# EAGLE board v1 (EAGLE 9.0.0)
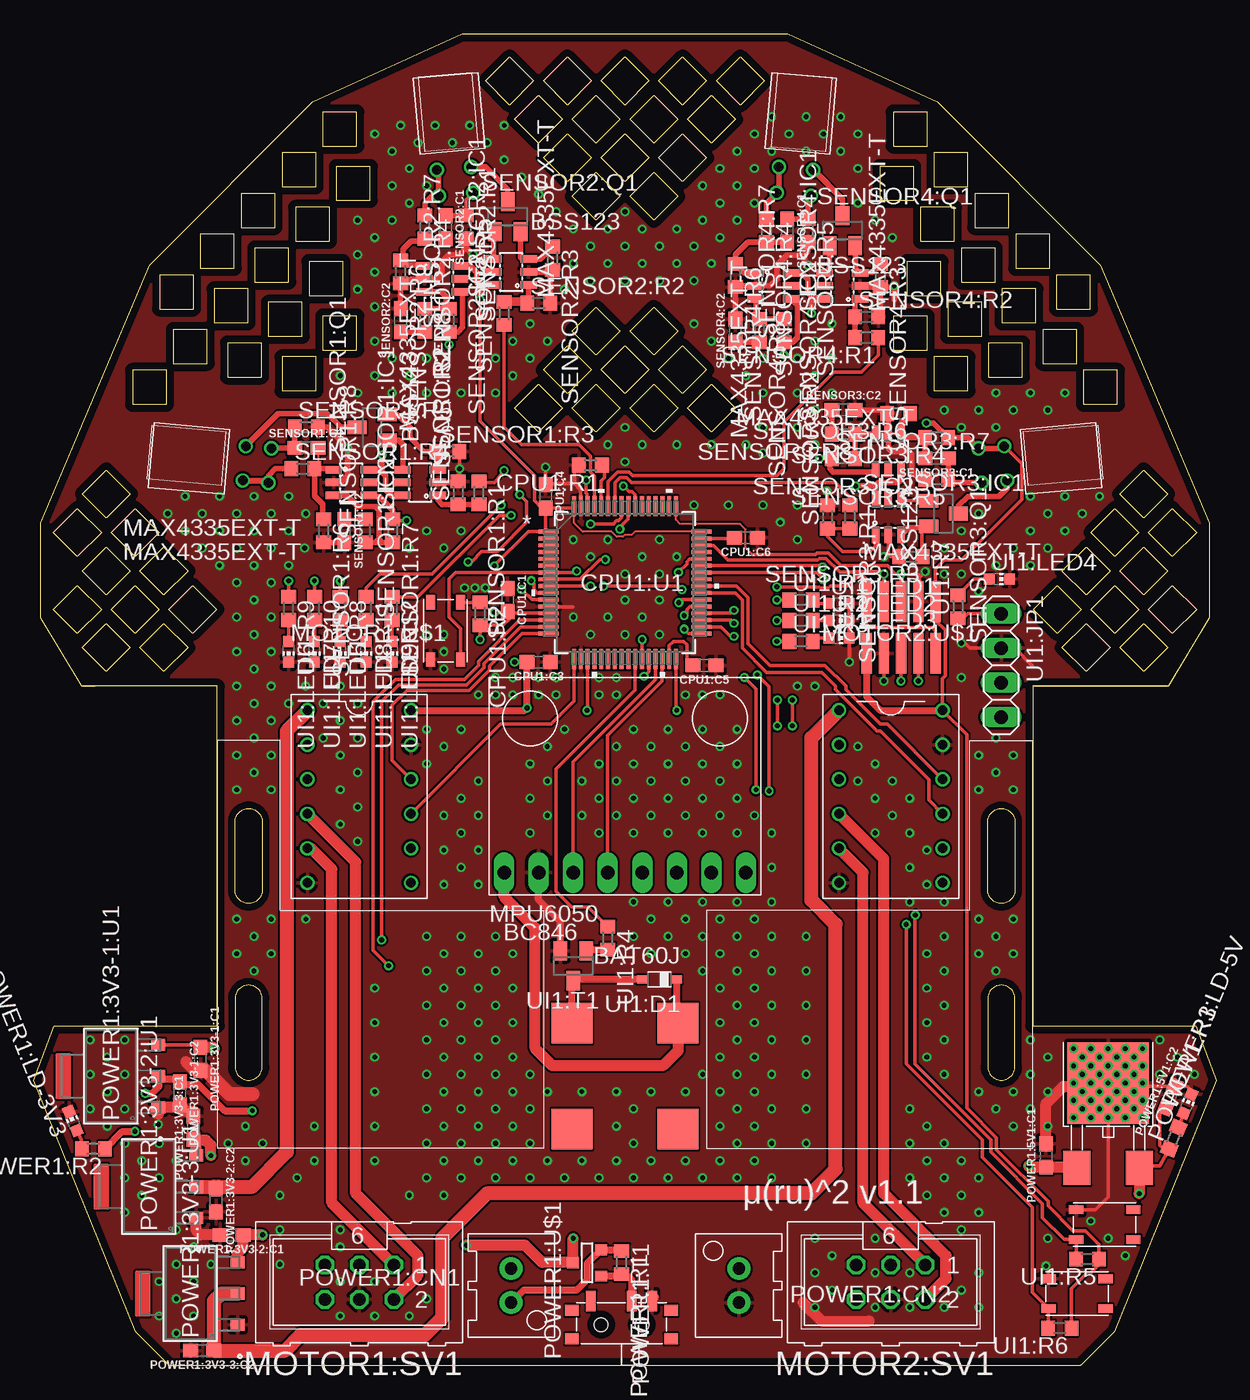
[diagram p0: board, top side]
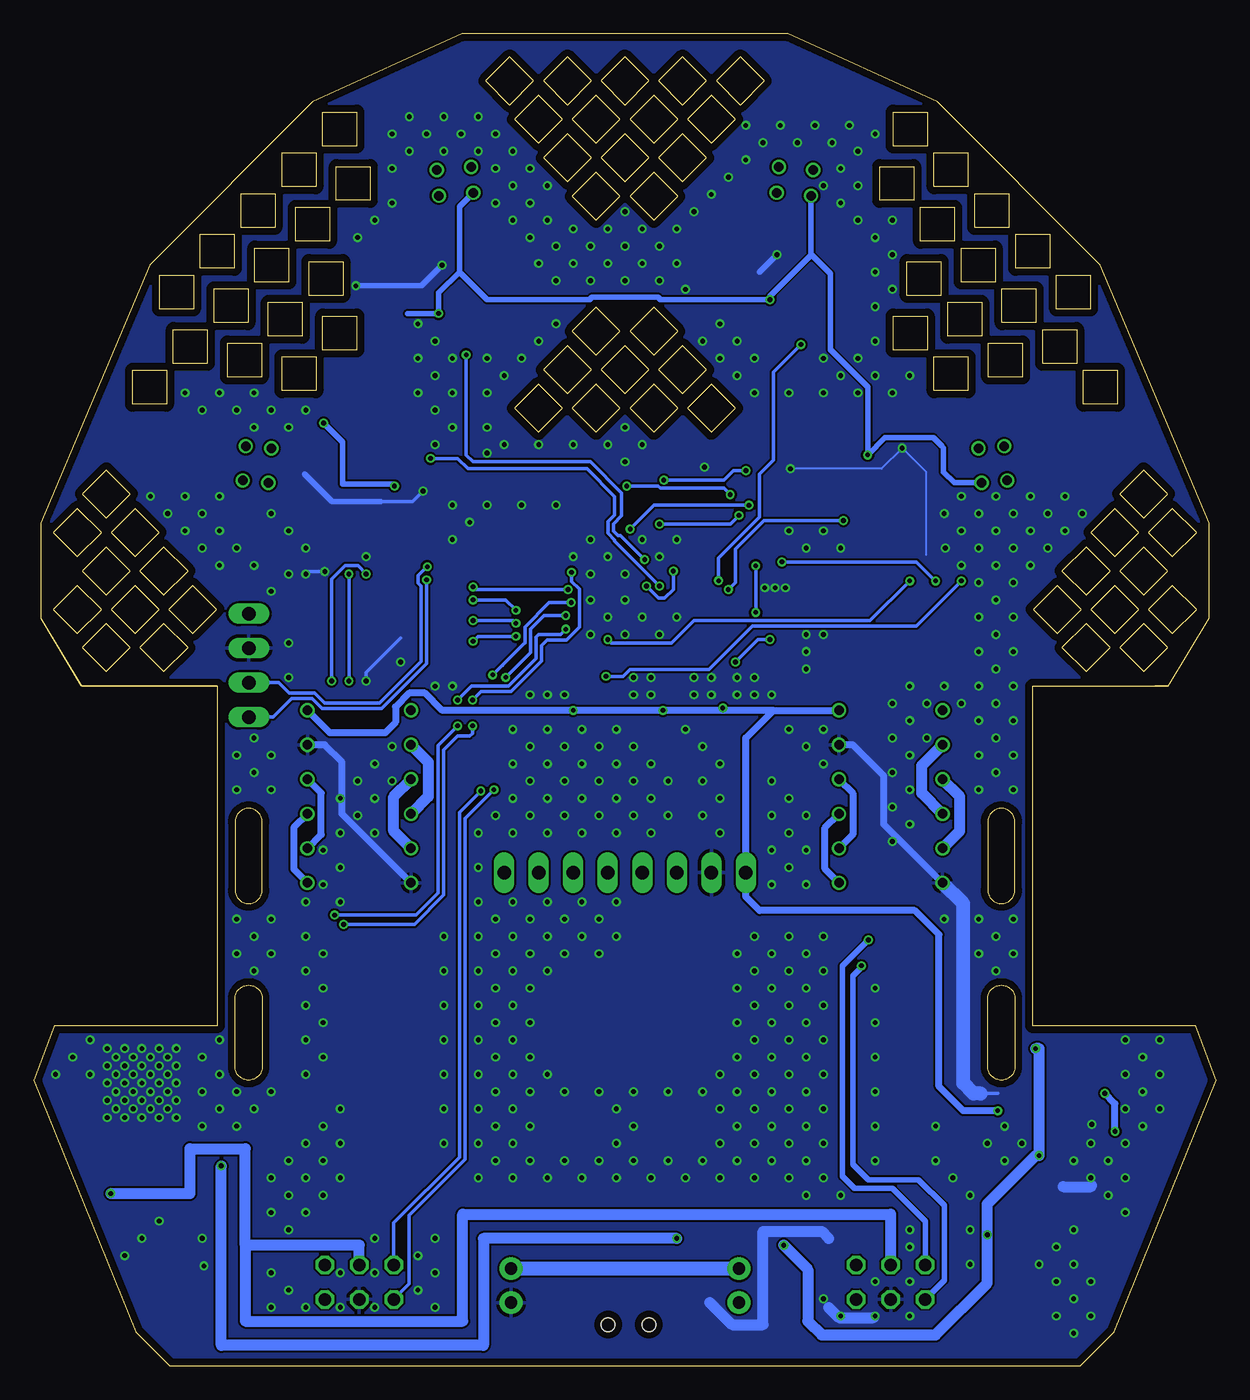
[diagram p1: board, bottom side, seen from below]

Size 87 x 98 mm. Coordinates in mm from the lower left corner, seen from the top.
Outline: 347 segments
Copper layers (1*16): Top 0.035mm / dielectric 1.6mm / Bottom 0.035mm
Design rules "Elecrow_2-layer_PCB_eagle_rule": minimum track width 6mil, minimum drill 12mil, track to track 6mil, track to pad 8mil, pad to pad 12mil, via to via 12mil, smd to smd 0mil, copper to edge 20mil, drill to drill 10mil, minimum pad ring 6mil, minimum via ring 6mil, stop-mask expansion 0mil, vias tented up to drill 100mil, thermal gap 10mil

## Footprints (pad centres in the part's own frame; a part is rotated, then mirrored left to right if it is on the bottom)
0603 = smd 1.1 x 1: 1 -0.85,0; 2 0.85,0
R0603 = smd 1 x 1.1: 1 -0.85,0; 2 0.85,0
LQFP-64 = smd 1.473 x 0.279: 1 -5.626,3.75; 2 -5.626,3.25; 3 -5.626,2.75; 4 -5.626,2.25; 5 -5.626,1.75; 6 -5.626,1.25; 7 -5.626,0.75; 8 -5.626,0.25; 9 -5.626,-0.25; 10 -5.626,-0.75; 11 -5.626,-1.25; 12 -5.626,-1.75; 13 -5.626,-2.25; 14 -5.626,-2.75; 15 -5.626,-3.25; 16 -5.626,-3.75; 33 5.626,-3.75; 34 5.626,-3.25; 35 5.626,-2.75; 36 5.626,-2.25; 37 5.626,-1.75; 38 5.626,-1.25; 39 5.626,-0.75; 40 5.626,-0.25; 41 5.626,0.25; 42 5.626,0.75; 43 5.626,1.25; 44 5.626,1.75; 45 5.626,2.25; 46 5.626,2.75; 47 5.626,3.25; 48 5.626,3.75 | smd 0.279 x 1.473: 17 -3.75,-5.626; 18 -3.25,-5.626; 19 -2.75,-5.626; 20 -2.25,-5.626; 21 -1.75,-5.626; 22 -1.25,-5.626; 23 -0.75,-5.626; 24 -0.25,-5.626; 25 0.25,-5.626; 26 0.75,-5.626; 27 1.25,-5.626; 28 1.75,-5.626; 29 2.25,-5.626; 30 2.75,-5.626; 31 3.25,-5.626; 32 3.75,-5.626; 49 3.75,5.626; 50 3.25,5.626; 51 2.75,5.626; 52 2.25,5.626; 53 1.75,5.626; 54 1.25,5.626; 55 0.75,5.626; 56 0.25,5.626; 57 -0.25,5.626; 58 -0.75,5.626; 59 -1.25,5.626; 60 -1.75,5.626; 61 -2.25,5.626; 62 -2.75,5.626; 63 -3.25,5.626; 64 -3.75,5.626
SKRPACE010 = smd 1.05 x 0.65: 1 -2.1,1.1; 2 2.1,1.1; 3 -2.1,-1.1; 4 2.1,-1.1
PINHEAD = smd 0.76 x 3: 1 -2.54,-1.905; 2 -1.27,-1.905; 3 0,-1.905; 4 1.27,-1.905; 5 2.54,-1.905; 6 2.54,1.905; 7 1.27,1.905; 8 0,1.905; 9 -1.27,1.905; 10 -2.54,1.905
BOARD = drill 1 long: AD0 6.35,-6.35; GND -6.35,-6.35; INT 8.89,-6.35; SCL -3.81,-6.35; SDA -1.27,-6.35; VCC -8.89,-6.35; XCL 1.27,-6.35; XDA 3.81,-6.35
ML6 = drill 0.914 octagon: 1 -2.54,-1.27; 2 -2.54,1.27; 3 0,-1.27; 4 0,1.27; 5 2.54,-1.27; 6 2.54,1.27
DIP_12 = drill 0.7: 1 -6.35,-3.81; 2 -3.81,-3.81; 3 -1.27,-3.81; 4 1.27,-3.81; 5 3.81,-3.81; 6 6.35,-3.81; 7 6.35,3.81; 8 3.81,3.81; 9 1.27,3.81; 10 -1.27,3.81; 11 -3.81,3.81; 12 -6.35,3.81
SOT-223_ST = smd 0.889 x 1.016: 1 -2.299,-3.493; 2 0,-3.493; 3 2.299,-3.493
TO-252-3 = smd 2 x 2.5: 1 -2.3,-6.25; 3 2.3,-6.25 | smd 6 x 6: 2 0,0
B02B-XASK-N = drill 0.9 pad 1.676: P$1 0,1.25; P$2 0,-1.25
CHIP-LED0603 = smd 0.8 x 0.8: A 0,-0.75; C 0,0.75
SOT-23 = smd 0.787 x 0.889: 1 0.025,-1.016; 2 -0.94,1.016; 3 0.991,1.016
SSW1P2T = smd 0.7 x 1.5: A -2.25,1.75; B 0.75,1.75; C 2.25,1.75 | smd 1 x 0.8: G@1 -3.65,1.05; G@2 -3.65,-1.05; G@3 3.65,1.05; G@4 3.65,-1.05 | hole 1: -1.5,0; 1.5,0
SOT23-6L = smd 0.55 x 1.2: 1 -0.95,-1.3; 2 0,-1.3; 3 0.95,-1.3; 4 0.95,1.3; 5 0,1.3; 6 -0.95,1.3
SOT23 = smd 1 x 1.4: 1 -0.95,-1.1; 2 0.95,-1.1; 3 0,1.1
LBR-127HLD = drill 0.7: P$1 -1.27,-1.27; P$2 1.27,-1.27; P$3 -1.27,-3.175; P$4 1.27,-3.175
SOD323_ST = smd 0.8 x 0.6: A 1.25,0; C -1.25,0
1X04 = drill 1.016 long: 1 -3.81,0; 2 -1.27,0; 3 1.27,0; 4 3.81,0
UGCT7525AN4 = smd 3 x 3: + -3.9,3.9; - -3.9,-3.9; NC@1 3.9,3.9; NC@2 3.9,-3.9

## Placement (x,y rotation side)
CPU1:C1  0.1uF  [0603]  34.86,56.35 270 top
CPU1:C3  0.1uF  [0603]  37.15,51.78 180 top
CPU1:C4  0.1uF  [0603]  37.66,63.97 270 top
CPU1:C5  0.1uF  [0603]  49.34,51.52 180 top
CPU1:C6  0.1uF  [0603]  52.39,60.92 180 top
CPU1:R1  10k  [R0603]  40.96,66.26 180 top
CPU1:R2  [R0603]  32.83,55.33 270 top
CPU1:U1  STM32F405RGT6  [LQFP-64]  43.5,57.62 0 top
CPU1:U$1  SKRPACE010  [SKRPACE010]  30.29,54.06 270 top
CPU1:U$2  PINHEAD_10_127  [PINHEAD]  63.82,54.32 180 top
GYRO1:U$1  MPU-6050-BOARD  [BOARD]  43.5,42.63 0 top
MOTOR1:SV1  [ML6]  23.94,6.14 180 top
MOTOR1:U$1  AE-DRV8835  [DIP_12]  23.94,41.87 270 top
MOTOR2:SV1  [ML6]  63.06,6.14 180 top
MOTOR2:U$1  AE-DRV8835  [DIP_12]  63.06,41.87 270 top
POWER1:3V3-1:C1  10nF  [0603]  12.26,22.57 270 top
POWER1:3V3-1:C2  10nF  [0603]  10.73,20.03 270 top
POWER1:3V3-1:U1  AZ1086H-3.3  [SOT-223_ST]  5.65,21.3 90 top
POWER1:3V3-2:C1  10nF  [0603]  14.54,9.61 180 top
POWER1:3V3-2:C2  10nF  [0603]  13.4,12.15 270 top
POWER1:3V3-2:U1  AZ1086H-3.3  [SOT-223_ST]  8.45,13.17 90 top
POWER1:3V3-3:C1  10nF  [0603]  11.75,17.49 90 top
POWER1:3V3-3:C2  10nF  [0603]  12.39,1.1 180 top
POWER1:3V3-3:U1  AZ1086H-3.3  [SOT-223_ST]  11.5,5.3 90 top
POWER1:5V1:C1  10nF  [0603]  74.49,15.46 90 top
POWER1:5V1:C2  10nF  [0603]  83.63,19.77 67.4 top
POWER1:5V1:U$1  NJM7805  [TO-252-3]  79.06,20.79 0 top
POWER1:CN1  2PIN-TOP  [B02B-XASK-N]  35.12,5.88 180 top
POWER1:CN2  2PIN-TOP  [B02B-XASK-N]  51.88,5.88 0 top
POWER1:LD-3V3  [CHIP-LED0603]  2.86,18 22.1 top
POWER1:LD-5V  [CHIP-LED0603]  84.9,19.27 337.4 top
POWER1:R1  [R0603]  43.25,7.58 270 top
POWER1:R2  [R0603]  4.38,15.96 180 top
POWER1:R3  [R0603]  83.89,16.73 67.4 top
POWER1:T1  [SOT-23]  40.71,7.58 270 top
POWER1:U$1  SSW1P2T  [SSW1P2T]  43.25,3.01 0 top
SENSOR1:C1  0.1uF  [0603]  20.05,67.53 0 top
SENSOR1:C2  0.1uF  [0603]  22.85,61.43 270 top
SENSOR1:IC1  MAX4335EXT-T  [SOT23-6L]  28.43,64.99 90 top
SENSOR1:IC2  MAX4335EXT-T  [SOT23-6L]  23.35,64.99 270 top
SENSOR1:Q1  BSS123  [SOT23]  24.88,69.05 90 top
SENSOR1:R1  [R0603]  32.75,64.22 270 top
SENSOR1:R2  [R0603]  31.23,64.22 90 top
SENSOR1:R3  47  [R0603]  30.47,67.27 0 top
SENSOR1:R4  100k  [R0603]  19.8,66 0 top
SENSOR1:R5  1k  [R0603]  20.05,69.05 0 top
SENSOR1:R6  10k  [R0603]  21.32,61.43 270 top
SENSOR1:R7  100k  [R0603]  26.4,61.43 270 top
SENSOR1:R8  10k  [R0603]  24.37,61.43 90 top
SENSOR1:U$1  [LBR-127HLD]  14.21,66.51 85 top
SENSOR2:C1  0.1uF  [0603]  30.29,83.78 270 top
SENSOR2:C2  0.1uF  [0603]  26.99,76.92 90 top
SENSOR2:IC1  MAX4335EXT-T  [SOT23-6L]  35.12,80.48 90 top
SENSOR2:IC2  MAX4335EXT-T  [SOT23-6L]  30.04,79.97 270 top
SENSOR2:Q1  BSS123  [SOT23]  34.86,84.54 0 top
SENSOR2:R1  [R0603]  34.61,77.43 90 top
SENSOR2:R2  [R0603]  37.15,78.19 0 top
SENSOR2:R3  47  [R0603]  38.17,81.5 270 top
SENSOR2:R4  100k  [R0603]  28.77,83.78 270 top
SENSOR2:R5  1k  [R0603]  31.82,83.78 270 top
SENSOR2:R6  10k  [R0603]  26.99,80.48 270 top
SENSOR2:R7  100k  [R0603]  30.55,76.92 90 top
SENSOR2:R8  10k  [R0603]  28.77,76.92 270 top
SENSOR2:U$1  [LBR-127HLD]  30.8,89.37 5 top
SENSOR3:C1  0.1uF  [0603]  66.44,66.76 180 top
SENSOR3:C2  0.1uF  [0603]  59.58,70.32 0 top
SENSOR3:IC1  MAX4335EXT-T  [SOT23-6L]  62.88,62.45 0 top
SENSOR3:IC2  MAX4335EXT-T  [SOT23-6L]  62.88,67.27 180 top
SENSOR3:Q1  BSS123  [SOT23]  66.95,62.7 270 top
SENSOR3:R1  [R0603]  60.06,62.45 270 top
SENSOR3:R2  [R0603]  58.41,62.45 90 top
SENSOR3:R3  47  [R0603]  64.53,59.52 180 top
SENSOR3:R4  100k  [R0603]  66.44,68.29 180 top
SENSOR3:R5  1k  [R0603]  66.44,65.24 180 top
SENSOR3:R6  10k  [R0603]  63.65,70.07 180 top
SENSOR3:R7  100k  [R0603]  59.58,66.76 0 top
SENSOR3:R8  10k  [R0603]  59.58,68.54 180 top
SENSOR3:U$1  [LBR-127HLD]  72.79,66.51 275 top
SENSOR4:C1  0.1uF  [0603]  55.44,83.53 270 top
SENSOR4:C2  0.1uF  [0603]  51.63,76.16 90 top
SENSOR4:IC1  MAX4335EXT-T  [SOT23-6L]  59.5,79.46 90 top
SENSOR4:IC2  MAX4335EXT-T  [SOT23-6L]  54.42,79.46 270 top
SENSOR4:Q1  BSS123  [SOT23]  59.5,83.53 0 top
SENSOR4:R1  [R0603]  61.28,75.65 180 top
SENSOR4:R2  [R0603]  61.28,77.18 0 top
SENSOR4:R3  47  [R0603]  62.3,80.23 270 top
SENSOR4:R4  100k  [R0603]  53.91,83.53 270 top
SENSOR4:R5  1k  [R0603]  56.96,83.53 270 top
SENSOR4:R6  10k  [R0603]  51.63,80.23 270 top
SENSOR4:R7  100k  [R0603]  55.18,76.16 90 top
SENSOR4:R8  10k  [R0603]  53.41,76.16 270 top
SENSOR4:U$1  [LBR-127HLD]  56.2,89.37 355 top
UI1:D1  BAT60J  [SOD323_ST]  46.04,28.41 180 top
UI1:JP1  [1X04]  71.19,51.52 270 top
UI1:LED1  [CHIP-LED0603]  59.25,56.1 270 top
UI1:LED2  [CHIP-LED0603]  59.25,54.83 270 top
UI1:LED3  [CHIP-LED0603]  59.25,53.56 270 top
UI1:LED4  [CHIP-LED0603]  71.06,57.87 270 top
UI1:LED5  [CHIP-LED0603]  22.55,52.54 180 top
UI1:LED6  [CHIP-LED0603]  18.73,52.54 180 top
UI1:LED7  [CHIP-LED0603]  20.64,52.54 180 top
UI1:LED8  [CHIP-LED0603]  24.45,52.54 180 top
UI1:LED9  [CHIP-LED0603]  26.36,52.54 180 top
UI1:R1  [R0603]  56.45,56.35 0 top
UI1:R2  [R0603]  56.45,54.83 0 top
UI1:R3  [R0603]  56.45,53.3 0 top
UI1:R4  [R0603]  42.23,31.46 270 top
UI1:R5  [R0603]  77.54,7.84 180 top
UI1:R6  [R0603]  75.5,2.76 180 top
UI1:R7  [R0603]  68.01,55.84 90 top
UI1:R8  [R0603]  22.55,55.72 270 top
UI1:R9  [R0603]  18.73,55.72 270 top
UI1:R10  [R0603]  20.64,55.72 270 top
UI1:R11  [R0603]  24.45,55.72 270 top
UI1:R12  [R0603]  26.36,55.72 270 top
UI1:T1  BC846  [SOT23]  39.69,29.43 180 top
UI1:U$1  UGCT725AN4  [UGCT7525AN4]  43.5,21.3 270 top
UI1:U$2  SKRPACE010  [SKRPACE010]  78.81,10.38 180 top
UI1:U$3  SKRPACE010  [SKRPACE010]  76.77,5.3 180 top

## Library data of the parts
CPU1:C1 CPU1:C3-CPU1:C6 SENSOR1:C1 SENSOR1:C2 SENSOR2:C1 SENSOR2:C2 SENSOR3:C1 SENSOR3:C2 SENSOR4:C1 SENSOR4:C2 = SparkFun-Capacitors; PROD_ID: CAP-00810
CPU1:R1 CPU1:R2 POWER1:R2 POWER1:R3 UI1:R1-UI1:R12 = rcl; SPICEPREFIX: R
CPU1:U1 = STM32F405RGT6; MANUFACTURER_PART_NUMBER: STM32F405RGT6; VENDOR: STMicroelectronics
CPU1:U$1 UI1:U$2 UI1:U$3 = SMDtact
CPU1:U$2 UI1:JP1 = pinhead
GYRO1:U$1 = MPU-6050
MOTOR1:SV1 MOTOR2:SV1 = con-ml; OC_FARNELL: unknown; OC_NEWARK: unknown
MOTOR1:U$1 MOTOR2:U$1 = drv8835
POWER1:3V3-1:C1 POWER1:3V3-1:C2 POWER1:3V3-2:C1 POWER1:3V3-2:C2 POWER1:3V3-3:C1 POWER1:3V3-3:C2 POWER1:5V1:C1 POWER1:5V1:C2 = SparkFun-Capacitors; PROD_ID: CAP-00867
POWER1:3V3-1:U1 POWER1:3V3-2:U1 POWER1:3V3-3:U1 = AZ1086H-3.3; MANUFACTURER_PART_NUMBER: LT3092EST#PBF; VENDOR: Linear Technology
POWER1:5V1:U$1 = NJM7805
POWER1:CN1 POWER1:CN2 = XA-connector_Kai
POWER1:LD-3V3 POWER1:LD-5V UI1:LED1-UI1:LED9 = led
POWER1:R1 SENSOR1:R1-SENSOR1:R8 SENSOR2:R1-SENSOR2:R8 SENSOR3:R1-SENSOR3:R8 SENSOR4:R1-SENSOR4:R8 = eagle-ltspice; SPICEMODEL: NONE; SPICEPREFIX: R
POWER1:T1 = zetex; OC_FARNELL: unknown; OC_NEWARK: unknown
POWER1:U$1 = ssw1p2t
SENSOR1:IC1 SENSOR1:IC2 SENSOR2:IC1 SENSOR2:IC2 SENSOR3:IC1 SENSOR3:IC2 SENSOR4:IC1 SENSOR4:IC2 = maxim; OC_FARNELL: unknown; OC_NEWARK: unknown
SENSOR1:Q1 SENSOR2:Q1 SENSOR3:Q1 SENSOR4:Q1 = transistor-small-signal
SENSOR1:U$1 SENSOR2:U$1 SENSOR3:U$1 SENSOR4:U$1 = phoitorteavht
UI1:D1 = diode
UI1:T1 = transistor-neu-to92
UI1:U$1 = UGCT7525AN4

## Nets
3V3: CPU1:C1.2 CPU1:C3.2 CPU1:C4.2 CPU1:R2.2 CPU1:U1.1 CPU1:U1.13 CPU1:U1.19 CPU1:U1.32 CPU1:U1.48 CPU1:U1.64 CPU1:U$2.1 CPU1:U$2.6 GYRO1:U$1.VCC MOTOR1:U$1.12 MOTOR2:U$1.12 POWER1:3V3-1:C2.1 POWER1:3V3-1:U1.2 POWER1:R2.1 SENSOR1:IC1.6 SENSOR1:IC2.6 SENSOR1:R4.1 SENSOR1:U$1.P$1 SENSOR1:U$1.P$3 SENSOR2:IC1.6 SENSOR2:IC2.6 SENSOR2:R4.1 SENSOR2:U$1.P$1 SENSOR2:U$1.P$3 SENSOR3:IC1.6 SENSOR3:IC2.6 SENSOR3:R4.1 SENSOR3:U$1.P$1 SENSOR3:U$1.P$3 SENSOR4:IC1.6 SENSOR4:IC2.6 SENSOR4:R4.1 SENSOR4:U$1.P$1 SENSOR4:U$1.P$3 UI1:D1.C UI1:R5.1 UI1:R6.1 UI1:U$1.+
5V: MOTOR1:SV1.3 MOTOR2:SV1.3 POWER1:5V1:C2.1 POWER1:5V1:U$1.3 POWER1:R3.1
CPU1:N$1: CPU1:R1.1 CPU1:U1.60
CPU1:N$2: CPU1:R2.1 CPU1:U$1.1
CPU1:N$3: CPU1:C5.2 CPU1:U1.31
CPU1:N$4: CPU1:C6.2 CPU1:U1.47
CPU1:NRST: CPU1:U1.7 CPU1:U$1.2 CPU1:U$2.5 CPU1:U$2.10
CPU1:SWCLK: CPU1:U1.49 CPU1:U$2.3 CPU1:U$2.8
CPU1:SWDIO: CPU1:U1.46 CPU1:U$2.4 CPU1:U$2.9
GND: CPU1:C1.1 CPU1:C3.1 CPU1:C4.1 CPU1:C5.1 CPU1:C6.1 CPU1:R1.2 CPU1:U1.12 CPU1:U1.18 CPU1:U1.63 CPU1:U$1.4 CPU1:U$2.2 CPU1:U$2.7 GYRO1:U$1.GND MOTOR1:SV1.4 MOTOR1:U$1.6 MOTOR1:U$1.11 MOTOR2:SV1.4 MOTOR2:U$1.6 MOTOR2:U$1.11 POWER1:3V3-1:C1.2 POWER1:3V3-1:C2.2 POWER1:3V3-1:U1.1 POWER1:3V3-2:C1.2 POWER1:3V3-2:C2.2 POWER1:3V3-2:U1.1 POWER1:3V3-3:C1.2 POWER1:3V3-3:C2.2 POWER1:3V3-3:U1.1 POWER1:5V1:C1.2 POWER1:5V1:C2.2 POWER1:5V1:U$1.2 POWER1:CN2.P$2 POWER1:LD-3V3.C POWER1:LD-5V.C POWER1:U$1.C SENSOR1:C2.2 SENSOR1:IC1.2 SENSOR1:IC2.2 SENSOR1:R2.2 SENSOR1:R3.2 SENSOR1:R5.2 SENSOR1:R6.2 SENSOR2:C2.2 SENSOR2:IC1.2 SENSOR2:IC2.2 SENSOR2:R2.2 SENSOR2:R3.2 SENSOR2:R5.2 SENSOR2:R6.2 SENSOR3:C2.2 SENSOR3:IC1.2 SENSOR3:IC2.2 SENSOR3:R2.2 SENSOR3:R3.2 SENSOR3:R5.2 SENSOR3:R6.2 SENSOR4:C2.2 SENSOR4:IC1.2 SENSOR4:IC2.2 SENSOR4:R2.2 SENSOR4:R3.2 SENSOR4:R5.2 SENSOR4:R6.2 UI1:JP1.2 UI1:LED1.C UI1:LED2.C UI1:LED3.C UI1:LED4.C UI1:LED5.C UI1:LED6.C UI1:LED7.C UI1:LED8.C UI1:LED9.C UI1:T1.2 UI1:U$2.4 UI1:U$3.4
GYRO1:N$8: GYRO1:U$1.XDA
GYRO1:N$9: GYRO1:U$1.XCL
GYRO1:N$10: GYRO1:U$1.AD0
MOTOR1:M+: MOTOR1:SV1.2 MOTOR1:U$1.2 MOTOR1:U$1.4
MOTOR1:M-: MOTOR1:SV1.1 MOTOR1:U$1.3 MOTOR1:U$1.5
MOTOR2:M+: MOTOR2:SV1.2 MOTOR2:U$1.2 MOTOR2:U$1.4
MOTOR2:M-: MOTOR2:SV1.1 MOTOR2:U$1.3 MOTOR2:U$1.5
N$1: CPU1:U1.38 MOTOR2:SV1.5
N$2: CPU1:U1.37 MOTOR2:SV1.6
N$3: CPU1:U1.39 MOTOR2:U$1.7 MOTOR2:U$1.9
N$4: CPU1:U1.15 MOTOR1:SV1.5
N$5: CPU1:U1.40 MOTOR2:U$1.8 MOTOR2:U$1.10
N$6: CPU1:U1.14 MOTOR1:SV1.6
N$7: CPU1:U1.17 MOTOR1:U$1.7 MOTOR1:U$1.9
N$8: CPU1:U1.16 MOTOR1:U$1.8 MOTOR1:U$1.10
N$9: CPU1:U1.36 UI1:R1.1
N$10: CPU1:U1.35 UI1:R2.1
N$11: CPU1:U1.34 UI1:R3.1
N$12: CPU1:U1.26 UI1:R4.1
N$13: CPU1:U1.33 UI1:R5.2 UI1:U$2.2
N$14: CPU1:U1.44 UI1:R6.2 UI1:U$3.2
N$15: CPU1:U1.30 GYRO1:U$1.SDA
N$16: CPU1:U1.29 GYRO1:U$1.SCL
N$17: CPU1:U1.62 SENSOR1:R1.1
N$18: CPU1:U1.61 SENSOR2:R1.1
N$19: CPU1:U1.11 SENSOR1:IC2.4 SENSOR1:R7.1
N$20: CPU1:U1.10 SENSOR2:IC2.4 SENSOR2:R7.1
N$21: CPU1:U1.58 SENSOR3:R1.1
N$22: CPU1:U1.9 SENSOR3:IC2.4 SENSOR3:R7.1
N$23: CPU1:U1.59 SENSOR4:R1.1
N$24: CPU1:U1.8 SENSOR4:IC2.4 SENSOR4:R7.1
N$25: CPU1:U1.42 UI1:JP1.4
N$26: CPU1:U1.43 UI1:JP1.3
N$27: CPU1:U1.27 UI1:R8.1
N$28: CPU1:U1.28 UI1:R9.1
N$29: CPU1:U1.55 UI1:R10.1
N$30: CPU1:U1.56 UI1:R11.1
N$31: CPU1:U1.57 UI1:R12.1
POWER1:BAT: POWER1:CN1.P$1 POWER1:R1.1 POWER1:T1.2
POWER1:N$1: POWER1:R1.2 POWER1:T1.3 POWER1:U$1.B
POWER1:N$2: POWER1:CN1.P$2 POWER1:CN2.P$1
POWER1:N$3: POWER1:LD-3V3.A POWER1:R2.2
POWER1:N$4: POWER1:LD-5V.A POWER1:R3.2
POWER1:VCC: POWER1:3V3-1:C1.1 POWER1:3V3-1:U1.3 POWER1:3V3-2:C1.1 POWER1:3V3-2:U1.3 POWER1:3V3-3:C1.1 POWER1:3V3-3:U1.3 POWER1:5V1:C1.1 POWER1:5V1:U$1.1 POWER1:T1.1
SENSOR1:N$1: SENSOR1:IC1.1 SENSOR1:R1.2 SENSOR1:R2.1
SENSOR1:N$2: SENSOR1:IC1.3 SENSOR1:Q1.2 SENSOR1:R3.1
SENSOR1:N$3: SENSOR1:IC1.4 SENSOR1:Q1.1
SENSOR1:N$4: SENSOR1:C1.2 SENSOR1:IC2.1 SENSOR1:R4.2 SENSOR1:R6.1
SENSOR1:N$5: SENSOR1:Q1.3 SENSOR1:U$1.P$2
SENSOR1:N$7: SENSOR1:IC2.3 SENSOR1:R7.2 SENSOR1:R8.1
SENSOR1:N$8: SENSOR1:C2.1 SENSOR1:R8.2
SENSOR1:N$9: SENSOR1:C1.1 SENSOR1:R5.1 SENSOR1:U$1.P$4
SENSOR2:N$1: SENSOR2:IC1.1 SENSOR2:R1.2 SENSOR2:R2.1
SENSOR2:N$2: SENSOR2:IC1.3 SENSOR2:Q1.2 SENSOR2:R3.1
SENSOR2:N$3: SENSOR2:IC1.4 SENSOR2:Q1.1
SENSOR2:N$4: SENSOR2:C1.2 SENSOR2:IC2.1 SENSOR2:R4.2 SENSOR2:R6.1
SENSOR2:N$5: SENSOR2:Q1.3 SENSOR2:U$1.P$2
SENSOR2:N$7: SENSOR2:IC2.3 SENSOR2:R7.2 SENSOR2:R8.1
SENSOR2:N$8: SENSOR2:C2.1 SENSOR2:R8.2
SENSOR2:N$9: SENSOR2:C1.1 SENSOR2:R5.1 SENSOR2:U$1.P$4
SENSOR3:N$1: SENSOR3:IC1.1 SENSOR3:R1.2 SENSOR3:R2.1
SENSOR3:N$2: SENSOR3:IC1.3 SENSOR3:Q1.2 SENSOR3:R3.1
SENSOR3:N$3: SENSOR3:IC1.4 SENSOR3:Q1.1
SENSOR3:N$4: SENSOR3:C1.2 SENSOR3:IC2.1 SENSOR3:R4.2 SENSOR3:R6.1
SENSOR3:N$5: SENSOR3:Q1.3 SENSOR3:U$1.P$2
SENSOR3:N$7: SENSOR3:IC2.3 SENSOR3:R7.2 SENSOR3:R8.1
SENSOR3:N$8: SENSOR3:C2.1 SENSOR3:R8.2
SENSOR3:N$9: SENSOR3:C1.1 SENSOR3:R5.1 SENSOR3:U$1.P$4
SENSOR4:N$1: SENSOR4:IC1.1 SENSOR4:R1.2 SENSOR4:R2.1
SENSOR4:N$2: SENSOR4:IC1.3 SENSOR4:Q1.2 SENSOR4:R3.1
SENSOR4:N$3: SENSOR4:IC1.4 SENSOR4:Q1.1
SENSOR4:N$4: SENSOR4:C1.2 SENSOR4:IC2.1 SENSOR4:R4.2 SENSOR4:R6.1
SENSOR4:N$5: SENSOR4:Q1.3 SENSOR4:U$1.P$2
SENSOR4:N$7: SENSOR4:IC2.3 SENSOR4:R7.2 SENSOR4:R8.1
SENSOR4:N$8: SENSOR4:C2.1 SENSOR4:R8.2
SENSOR4:N$9: SENSOR4:C1.1 SENSOR4:R5.1 SENSOR4:U$1.P$4
UI1:N$1: UI1:LED1.A UI1:R1.2
UI1:N$2: UI1:LED2.A UI1:R2.2
UI1:N$3: UI1:LED3.A UI1:R3.2
UI1:N$4: UI1:D1.A UI1:T1.3 UI1:U$1.-
UI1:N$5: UI1:R4.2 UI1:T1.1
UI1:N$6: UI1:JP1.1 UI1:R7.1
UI1:N$7: UI1:LED4.A UI1:R7.2
UI1:N$8: UI1:LED5.A UI1:R8.2
UI1:N$9: UI1:LED6.A UI1:R9.2
UI1:N$10: UI1:LED7.A UI1:R10.2
UI1:N$11: UI1:LED8.A UI1:R11.2
UI1:N$12: UI1:LED9.A UI1:R12.2
VCCM1: MOTOR1:U$1.1 POWER1:3V3-2:C2.1 POWER1:3V3-2:U1.2
VCCM2: MOTOR2:U$1.1 POWER1:3V3-3:C2.1 POWER1:3V3-3:U1.2

## Tracks (layer width: path | path; a pad name or v marks a point on that pad's centre or on a via)
3V3  (via drill 0.35)
  Top 0.152: 25.64,65.75 25.51,65.88 25.45,65.94 25.39,65.94 25.64,66.19 v25.64,67.02 | SENSOR1:U$1.P$1 15.53,64.97 SENSOR1:U$1.P$3 17.51,64.97 | CPU1:U1.64 39.75,62.01 40.38,61.37 42.52,61.37 42.89,61 43.35,61 43.48,61.13 43.98,61.13 44.23,61.37 CPU1:U1.48
  Top 0.254: POWER1:3V3-1:U1.2 9.21,21.3 | 10.99,21.3 10.73,21.04 POWER1:3V3-1:C2.1 11.08,20.54 | UI1:R6.1 76.35,5.64 77.54,6.82 77.79,6.82 78.39,7.42 UI1:R5.1 78.39,8.91 77.37,9.93 76.46,9.93 74.64,11.75 74.64,12.07 70.83,15.88 70.83,16.77 68.65,18.95 68.65,46.44 MOTOR2:U$1.12 66.87,50.57 67.07,50.78 67.07,54.12 66.36,54.83 CPU1:U$2.1 66.36,58.64 67,59.27 68.27,59.27 72.71,63.72 72.71,66.37 SENSOR3:U$1.P$1 | CPU1:U1.13 34.99,55.37 | 34.93,55.43 CPU1:C1.2 | CPU1:C4.2 39.62,63.12 CPU1:U1.64 | CPU1:C4.2 37.66,61.59 CPU1:U1.1 36.39,61.37 v33.88,58.86 | 34.99,55.37 34.99,54.96 34.52,54.48 CPU1:R2.2 v32.83,53.43 | CPU1:C3.2 v35.37,51.78 | CPU1:U1.19 40.75,48.27 v40.71,48.22 | CPU1:U1.32 47.25,48.28 v47.31,48.22 | CPU1:C4.2 37.37,63.12 36.83,63.66 36.83,65.51 32.83,69.5 v32.83,78.45 | v33.88,55.43 34.93,55.43 | 34.93,55.43 34.99,55.37
  Top 0.406: SENSOR1:U$1.P$1 17.35,65.13 17.51,64.97 | SENSOR1:U$1.P$3 17.26,65.5 17.77,66 SENSOR1:R4.1 | SENSOR1:IC2.6 25.39,65.94 | 25.51,65.88 25.64,66 v25.64,67.02 | 25.64,65.75 25.89,65.49 25.89,64.48 26.34,64.04 SENSOR1:IC1.6 | SENSOR2:R4.1 28.77,85.56 29.3,86.1 29.78,86.1 | 29.78,86.1 SENSOR2:U$1.P$3 | SENSOR2:U$1.P$1 29.78,87.86 29.78,86.1 | SENSOR2:IC2.6 32.14,80.92 32.58,80.48 32.58,79.72 32.83,79.46 | SENSOR2:IC1.6 33.75,79.46 32.83,79.46 | v32.83,78.45 32.83,79.46 | SENSOR4:R4.1 53.91,85.56 54.66,86.3 SENSOR4:U$1.P$3 54.82,86.48 SENSOR4:U$1.P$1 | SENSOR4:IC2.6 56.52,80.41 56.96,79.97 56.96,78.96 57.4,78.51 57.47,78.51 | SENSOR4:IC1.6 57.47,78.51 | v57.22,77.43 57.22,78.26 57.47,78.51 | SENSOR3:U$1.P$1 71.25,67.5 SENSOR3:U$1.P$3 68.73,68.29 SENSOR3:R4.1 66.21,69.37 v65.68,69.37 | SENSOR3:IC2.6 63.83,65.17 63.63,64.97 62.12,64.97 61.93,64.78 | SENSOR3:IC1.6 61.93,64.78 | v60.47,64.73 60.52,64.78 61.93,64.78
  Top 0.508: UI1:D1.C 47.29,25.31 UI1:U$1.+ | POWER1:R2.1 6.5,17.23 v7.43,17.23 | v8.19,20.03 8.7,20.03 9.21,20.54 9.21,21.04 | 9.21,21.04 9.21,21.3 | 9.21,21.04 10.57,21.04 POWER1:3V3-1:C2.1 10.9,20.71 12.08,20.71 14.04,18.76 v16.07,18.76 | MOTOR1:U$1.12 36.13,48.22 v36.3,48.39 CPU1:C3.2 | CPU1:U$2.6 61.28,49.24 62.3,48.22 MOTOR2:U$1.12
  Top 0.813: UI1:U$1.+ 47.4,23.17 46.29,22.06 38.17,22.06 36.9,23.33 36.9,32.22 34.61,34.51 GYRO1:U$1.VCC
  Bottom 0.152: 20.05,67.53 20.18,67.65
  Bottom 0.254: v35.37,51.78 33.72,53.43 v32.83,53.43 | v33.88,58.86 v33.88,55.43
  Bottom 0.406: SENSOR2:U$1.P$3 29.81,81.72 | 29.81,81.72 32.83,78.7 v32.83,78.45 40.89,78.45 41.07,78.63 45.93,78.63 46.11,78.45 53.66,78.45 55.69,80.48 | SENSOR4:U$1.P$3 55.69,85.28 55.69,80.48 | 55.69,80.48 57.22,78.96 v57.22,77.43 59.5,77.43 | SENSOR1:U$1.P$3 19.27,64.97 20.05,65.75 20.05,67.53 | 20.18,67.65 20.81,68.29 24.37,68.29 v25.64,67.02 25.64,72.02 28.39,74.77 28.39,80.35 29.76,81.72 29.81,81.72 | v65.68,69.37 64.28,67.97 64.28,64.86 60.6,64.86 v60.47,64.73
  Bottom 0.508: v7.43,17.23 7.43,19.27 v8.19,20.03 | v16.07,18.76 18.61,18.76 20.39,20.54 20.39,31.71 22.16,33.49 33.59,33.49 34.61,34.51 GYRO1:U$1.VCC 34.61,46.19 32.58,48.22 | 32.58,48.22 MOTOR1:U$1.12 | 32.58,48.22 v40.71,48.22 v47.31,48.22 56.96,48.22 58.23,49.49 59.38,49.49 60.39,48.48 60.39,47.33 61.15,46.57 65.22,46.57 MOTOR2:U$1.12
5V  (via drill 0.35)
  Top 0.254: 81.35,14.55 POWER1:5V1:U$1.3 81.51,14.69 82.87,14.69 POWER1:R3.1 83.15,15.94 82.87,16.22 82.87,18.55 POWER1:5V1:C2.1
  Top 0.813: POWER1:5V1:U$1.3 81.36,12.68 v81.35,12.66
  Bottom 0.813: v81.35,12.66 75.5,12.66 75.5,15.96 71.44,15.96 71.44,8.85 | MOTOR2:SV1.3 63.06,8.85 71.44,8.85 | MOTOR1:SV1.3 23.94,11.14 55.44,11.14 55.44,3.26 71.44,3.26 71.44,8.85
CPU1:N$1
  Top 0.254: CPU1:U1.60 41.72,63.27 41.72,65.09 41.98,65.34 41.98,66.09 CPU1:R1.1
CPU1:N$2
  Top 0.254: CPU1:U$1.1 32.81,56.16 CPU1:R2.1
CPU1:N$3
  Top 0.254: CPU1:U1.31 46.75,53 47.06,53.3 47.82,53.3 48.07,53.05 48.07,51.94 CPU1:C5.2
CPU1:N$4
  Top 0.254: CPU1:U1.47 51.49,60.87 CPU1:C6.2
CPU1:NRST  (via drill 0.35)
  Top 0.203: 57.6,57.31 57.8,57.31 57.86,57.25 58.49,57.25 58.61,57.37
  Top 0.254: CPU1:U$1.2 31.39,54.23 30.55,55.08 30.55,57.87 31.04,58.37 CPU1:U1.7 39.84,58.37 v39.94,58.48 | CPU1:U$2.10 66.36,54.06 66.11,54.32 61.53,54.32 61.28,54.57 CPU1:U$2.5 | CPU1:U$2.5 61.28,56.35 | v54.68,57.31 57.6,57.31 | CPU1:U$2.5 61.28,57.87 61.11,58.04 60.55,58.04 59.88,57.37 58.61,57.37 | v41.92,57.37 47.44,57.37 v47.69,57.11
  Bottom 0.254: v39.94,58.48 39.94,57.11 40.58,56.48 41.03,56.48 v41.92,57.37 | v47.69,57.11 54.48,57.11 v54.68,57.31
CPU1:SWCLK  (via drill 0.35)
  Top 0.152: 52.9,59.68 52.37,60.21 52.37,61.54 51.97,61.94 47.56,61.94 47.25,62.25 CPU1:U1.49
  Top 0.254: CPU1:U$2.8 v63.82,50.38 | CPU1:U$2.3 v63.82,58.26 63.41,58.26 62.8,58.86 59.41,58.86 58.47,59.8 57.63,59.8 57.51,59.68 52.9,59.68
  Bottom 0.254: v63.82,50.38 v63.82,58.26
CPU1:SWDIO  (via drill 0.35)
  Top 0.254: CPU1:U$2.9 v65.09,50.38 | CPU1:U$2.4 v62.55,58.26 62.36,58.45 60.39,58.45 60.32,58.38 59.31,58.38 58.3,59.39 57.8,59.39 57.68,59.28 51.06,59.28 50,60.34 49.16,60.34 CPU1:U1.46
  Bottom 0.254: v65.09,50.38 65.09,57.87 64.1,58.86 63.16,58.86 v62.55,58.26
GND  (via drill 0.35)
  Top 0.152: SENSOR1:R2.2 31.14,64.99 30.97,64.99
  Top 0.254: 11.82,18.69 POWER1:3V3-3:C1.2 | 73.47,51.52 73.48,51.54 73.46,51.54 72.2,52.79 UI1:JP1.2 68.9,52.79 68.01,53.68 | POWER1:LD-5V.C 85.19,20.25 84.88,20.56 POWER1:5V1:C2.2 79.29,20.56 POWER1:5V1:U$1.2 | UI1:U$2.4 78.13,11.48 79.06,12.41 79.06,20.28 78.81,20.54 | UI1:U$3.4 74.67,7.14 v74.49,7.33 | 37.74,64.9 CPU1:C4.1 v37.66,66.13 | 37.74,64.9 37.82,64.99 | 40.22,63.28 CPU1:U1.63 40.25,64.02 40.24,64.03 40.24,64.44 39.77,64.9 | UI1:LED1.C UI1:LED2.C UI1:LED3.C 60.01,53.54 v60.01,51.78 | MOTOR2:SV1.4 63.02,4.83 | SENSOR1:R3.2 v31.32,66 31.32,65.16 SENSOR1:R2.2 | 39.77,64.9 37.74,64.9 | 39.77,64.9 39.77,65.92 CPU1:R1.2 | CPU1:U$2.7 v62.55,50.38 | CPU1:U1.12 37.9,55.84 39.69,55.84 | SENSOR3:R2.2 58.41,64.3 v58.36,64.35 | CPU1:U$2.2 65.09,57.94 v65.6,58.44 | SENSOR3:R3.2 63.06,59.52 62.88,59.7 SENSOR3:IC1.2
  Top 0.406: SENSOR1:IC2.2 22.59,64.99 23.1,65.49 v23.1,67.53 21.58,69.05 SENSOR1:R5.2 | SENSOR1:IC1.2 30.97,64.99 | SENSOR1:C2.2 SENSOR1:R6.2 | 31.82,82.26 31.31,81.75 30.55,81.75 30.04,81.24 30.04,80.23 29.78,79.97 SENSOR2:IC2.2 27.75,79.97 27.41,79.63 SENSOR2:R6.2 SENSOR2:C2.2 | 31.82,82.26 SENSOR2:R5.2 | SENSOR2:R3.2 38,80.48 37.91,80.48 | SENSOR2:IC1.2 37.91,80.48 | SENSOR2:R2.2 38,80.39 37.91,80.48 | v32.32,81.75 31.82,82.26 | SENSOR4:C2.2 SENSOR4:R6.2 51.72,79.46 SENSOR4:IC2.2 54.17,79.46 54.68,79.97 54.68,80.99 55.41,81.72 56.48,81.72 56.71,81.5 | SENSOR4:R5.2 56.96,82 56.71,81.75 56.71,81.5 | SENSOR4:IC1.2 60.89,79.38 SENSOR4:R3.2 | SENSOR4:R2.2 62.3,77.27 SENSOR4:R3.2 | SENSOR4:R3.2 63.22,79.38 v63.31,79.46 63.31,78.45 | v56.96,80.99 56.71,81.24 56.71,81.5 | SENSOR3:C2.2 62.54,70.32 | 62.88,69.81 SENSOR3:IC2.2 62.88,67.53 63.14,67.27 64.41,67.27 64.63,67.05 64.63,65.78 64.92,65.49 65.34,65.49 SENSOR3:R5.2 | 62.88,69.81 62.88,69.98 SENSOR3:R6.2 | CPU1:U$2.2 65.09,58.13 | 62.76,69.94 62.88,69.81
  Top 0.508: POWER1:U$1.C 45.78,5.04 | UI1:T1.2 38.74,32.66 37.15,34.25 GYRO1:U$1.GND
  Top 0.813: POWER1:3V3-2:C1.2 12.26,9.61 11.94,9.93 POWER1:3V3-2:U1.1 | 56.61,4.63 57.98,3.26 61.45,3.26 | POWER1:3V3-1:U1.1 10.55,19 POWER1:3V3-1:C2.2 11.22,18.69 11.82,18.69 | 8.9,18.75 9.15,18.5 | POWER1:3V3-1:C1.2 11.81,21.72 11.17,22.35 | POWER1:5V1:C1.2 74.49,19.27 75.76,20.54 78.81,20.54 79.27,20.54 79.29,20.56
  Top 1.016: POWER1:3V3-1:C1.2 12.64,21.72 14.38,19.98 16.07,19.98
  Bottom 0.152: v31.32,66 24.62,66 v23.1,67.53 21.32,65.75 21.32,59.65
  Bottom 0.254: v62.55,50.38 62.55,51.02 UI1:LED3.C | v37.66,66.13 37.78,66.13 | 16.07,20.03 17.34,20.03 | v58.36,64.35 59.12,63.59 61.49,63.59 | v65.6,58.44 66.81,58.44 v67,58.26
  Bottom 0.406: 33.59,80.48 v32.32,81.75 | v63.31,79.46 58.49,79.46 v56.96,80.99 | 61.49,63.59 65.04,63.59 67.08,65.62
  Bottom 0.508: MOTOR2:U$1.6 64.33,40.6 64.33,44.41 65.6,45.68 MOTOR2:U$1.11 | MOTOR1:U$1.6 24.45,39.84 24.45,43.4 26.74,45.68 MOTOR1:U$1.11
  Bottom 0.813: 37.25,4.63 35.63,3.01 33.34,3.01 33.34,9.87 29.02,9.87 28.51,9.36 | 28.51,4.28 27.75,3.52 25.21,3.52 | 23.94,4.79 MOTOR1:SV1.4 | 11.24,13.17 9.21,13.17 9.15,13.23
  Bottom 1.016: 17.34,20.03 17.85,20.03 18.61,20.79 18.61,34 MOTOR1:U$1.6
  other vias: 9.15,17.74 33.21,57.24 32.45,57.24 31.69,57.24 17.46,57.62 16.2,56.35 17.46,55.08 16.2,53.81 17.46,52.54 16.2,51.27 22.55,50 20,50 17.46,50 16.2,48.73 18.73,48.73 17.46,47.46 16.2,46.19 17.46,44.92 16.2,43.65 17.46,42.38 21.27,48.73 23.82,48.73 22.55,47.46 21.27,46.19 23.82,46.19 22.55,44.92 23.82,43.65 22.55,42.38 23.82,41.11 22.55,39.84 23.82,38.57 40.96,53.81 43.5,53.81 46.04,53.81 44.77,55.08 42.23,55.08 39.69,55.08 43.5,56.35 46.04,56.35 43.5,58.26 46.04,58.26 47.31,59.52 46.04,60.8 44.77,59.52 40.96,59.52 39.69,60.8 42.23,60.8 28.89,53.81 30.16,53.81 30.16,52.54 30.16,51.27 76.52,23.33 77.79,23.33 79.06,23.33 80.33,23.33 81.6,23.33 80.97,22.7 79.69,22.7 78.42,22.7 77.16,22.7 76.52,22.06 77.79,22.06 79.06,22.06 80.33,22.06 81.6,22.06 80.97,21.43 79.69,21.43 78.42,21.43 77.16,21.43 76.52,20.79 77.79,20.79 79.06,20.79 80.33,20.79 81.6,20.79 80.97,20.16 79.69,20.16 78.42,20.16 77.16,20.16 76.52,19.52 77.79,19.52 79.06,19.52 80.33,19.52 81.6,19.52 80.97,18.89 79.69,18.89 78.42,18.89 77.16,18.89 76.52,18.25 77.79,18.25 79.06,18.25 80.33,18.25 81.6,18.25 22.55,3.65 25.09,3.65 27.62,3.65 28.89,4.91 25.09,6.19 22.55,6.19 22.55,8.73 22.55,9.99 57.47,4.28 58.74,5.55 57.47,6.82 58.74,8.09 57.47,9.36 61.91,4.28 61.91,6.82 61.91,9.36 64.45,4.28 64.45,6.82 67,4.28 68.27,5.55 69.53,4.28 69.53,6.82 60.64,45.55 61.91,44.28 61.91,41.74 61.91,39.2 63.19,40.48 63.19,43.02 64.45,39.2 64.45,41.74 64.45,36.66 65.72,37.94 65.72,35.39 64.45,34.12 67,34.12 67,31.59 65.72,30.32 67,29.05 65.72,27.77 67,26.5 65.72,25.23 67,23.96 65.72,22.7 67,21.43 20,32.86 17.46,32.86 16.2,31.59 17.46,30.32 16.2,29.05 69.53,32.86 70.81,31.59 70.81,29.05 69.53,30.32 72.08,32.86 72.08,30.32 14.93,30.32 14.93,32.86 69.53,42.38 72.08,42.38 70.81,43.65 69.53,44.92 72.08,44.92 70.81,46.19 14.93,42.38 14.93,44.92 14.93,47.46 14.93,50 14.93,52.54 14.93,55.08 14.93,57.62 68.27,50.63 68.27,53.17 69.53,56.98 68.27,58.26 56.2,60.8 54.93,62.06 56.2,63.34 53.66,63.34 51.12,63.34 48.58,63.34 18.73,58.89 16.2,58.89 13.66,58.89 19.93,60.16 12.39,60.16 56.2,50 57.47,50 37.15,50.63 38.42,50.63 38.42,49.37 37.15,49.37 35.24,49.37 35.24,50.63 33.98,50.63 33.98,49.37 32.7,49.37 41.59,49.37 42.87,49.37 42.87,50.63 41.59,50.63 47.95,49.37 49.22,49.37 50.48,49.37 51.76,46.83 49.22,46.83 46.67,46.83 44.13,46.83 44.13,44.28 46.67,44.28 49.22,44.28 51.76,44.28 51.76,41.74 49.22,41.74 46.67,41.74 44.13,41.74 45.41,43.02 45.41,45.55 47.95,45.55 47.95,43.02 50.48,43.02 50.48,45.55 45.41,40.48 47.95,40.48 50.48,40.48 51.76,39.2 49.22,39.2 46.67,39.2 44.13,39.2 42.87,40.48 42.87,43.02 42.87,45.55 41.59,44.28 41.59,41.74 41.59,39.2 40.33,40.48 40.33,43.02 37.78,40.48 37.78,43.02 36.52,41.74 36.52,39.2 36.52,44.28 37.78,45.55 39.05,46.83 32.7,40.48 32.7,43.02 31.44,41.74 31.44,39.2 32.7,37.94 31.44,36.66 30.16,37.94 30.16,40.48 32.7,35.39 30.16,35.39 30.16,45.55 31.44,46.83 28.89,46.83 28.89,44.28 53.02,40.48 54.3,39.2 54.3,36.66 54.3,34.12 53.02,32.86 51.76,34.12 54.3,31.59 51.76,31.59 50.48,32.86 49.22,31.59 49.22,34.12 47.95,32.86 46.67,31.59 46.67,34.12 45.41,32.86 44.13,31.59 44.13,34.12 45.41,30.32 47.95,30.32 49.22,29.05 50.48,30.32 51.76,29.05 53.02,30.32 54.3,29.05 53.02,27.77 50.48,27.77 51.76,26.5 54.3,26.5 53.02,25.23 50.48,25.23 51.76,23.96 54.3,23.96 53.02,22.7 50.48,22.7 49.22,21.43 51.76,21.43 54.3,21.43 53.02,20.16 50.48,20.16 47.95,20.16 45.41,20.16 44.13,18.89 42.87,20.16 42.87,17.62 44.13,16.34 40.33,20.16 37.78,20.16 36.52,21.43 36.52,18.89 35.24,20.16 35.24,22.7 33.98,23.96 32.7,25.23 31.44,26.5 30.16,27.77 28.89,29.05 28.89,31.59 30.16,30.32 31.44,29.05 32.7,27.77 33.98,26.5 35.24,25.23 35.24,27.77 33.98,29.05 32.7,30.32 31.44,31.59 33.98,31.59 35.24,30.32 28.89,26.5 30.16,25.23 31.44,23.96 32.7,22.7 33.98,21.43 28.89,23.96 30.16,22.7 31.44,21.43 32.7,20.16 33.98,18.89 35.24,17.62 36.52,16.34 35.24,15.08 33.98,16.34 32.7,17.62 31.44,18.89 30.16,20.16 28.89,21.43 28.89,18.89 30.16,17.62 31.44,16.34 32.7,15.08 33.98,13.8 31.44,13.8 30.16,15.08 28.89,16.34 28.89,13.8 30.16,12.53 27.62,12.53 36.52,13.8 37.78,15.08 39.05,13.8 40.33,15.08 41.59,13.8 42.87,15.08 44.13,13.8 45.41,15.08 46.67,13.8 47.95,15.08 49.22,13.8 50.48,15.08 50.48,17.62 51.76,18.89 53.02,17.62 51.76,16.34 51.76,13.8 53.02,15.08 54.3,13.8 54.3,16.34 54.3,18.89 56.84,18.89 56.84,16.34 56.84,21.43 56.84,23.96 56.84,26.5 56.84,29.05 56.84,31.59 60.64,43.02 25.09,15.08 25.09,17.62 25.09,20.16 25.09,22.7 25.09,25.23 25.09,27.77 20.64,15.08 20.64,17.62 19.37,13.8 18.1,12.53 18.1,9.99 18.1,7.45 64.45,18.89 65.72,17.62 64.45,16.34 67,16.34 65.72,15.08 68.27,15.08 67,13.8 64.45,13.8 65.72,12.53 68.27,12.53 69.53,13.8 69.53,11.27 67,11.27 68.27,9.99 74.61,9.36 77.79,10.63 79.06,9.36 80.33,8.09 73.34,23.96 74.61,22.7 73.34,21.43 74.61,20.16 73.34,18.89 72.08,20.16 70.81,18.89 69.53,20.16 72.08,17.62 74.61,17.62 82.87,23.96 82.87,21.43 84.14,22.7 85.41,21.43 26.36,71.59 28.89,71.59 27.62,72.86 28.89,74.13 23.82,71.59 25.09,72.86 26.36,74.13 25.09,75.4 22.55,72.86 25.09,77.94 23.82,79.21 25.09,80.48 23.82,81.75 25.09,83.02 26.36,84.29 23.82,84.29 27.62,85.56 26.36,86.83 28.89,86.83 27.62,88.1 26.36,89.37 26.99,91.28 30.8,90 33.34,90 34.61,88.73 35.88,87.47 37.15,86.19 38.42,84.92 39.69,83.66 40.96,82.38 42.23,81.11 43.5,79.84 42.23,83.66 43.5,84.92 44.77,83.66 43.5,82.38 44.77,81.11 47.31,81.11 46.04,82.38 47.31,83.66 48.58,82.38 48.58,79.84 50.48,83.02 49.22,84.29 49.22,86.83 50.48,85.56 51.76,84.29 53.02,85.56 51.76,86.83 50.48,88.1 51.76,89.37 53.02,88.1 53.02,90.64 54.3,89.37 54.3,91.91 55.56,90.64 56.84,89.37 56.84,91.91 58.11,90.64 59.38,89.37 60.64,90.64 60.64,88.1 60.64,85.56 61.91,84.29 63.19,83.02 59.38,91.91 58.74,76.67 57.47,75.4 58.74,74.13 57.47,72.86 56.2,74.13 56.2,71.59 58.74,71.59 57.47,70.32 56.2,69.05 57.47,67.78 53.66,71.59 53.66,69.05 52.39,67.78 53.66,67.14 52.39,72.86 53.66,74.13 51.12,74.13 49.85,75.4 48.58,76.67 49.85,67.78 47.31,67.78 44.77,67.78 43.5,69.05 42.23,67.78 43.5,66.51 70.81,71.59 72.08,70.32 73.34,71.59 74.61,70.32 75.88,71.59 78.42,63.97 77.16,62.7 75.88,61.43 74.61,62.7 73.34,61.43 74.61,60.16 72.08,60.16 39.05,79.21 37.78,75.4 36.52,74.13 35.24,72.86 35.24,75.4 36.52,76.67 33.98,71.59 33.98,74.13 31.44,71.59 14.93,60.16 17.46,60.16 16.2,61.43 13.66,61.43 14.93,62.7 12.39,62.7 11.12,61.43 9.84,62.7 11.12,63.97 13.66,63.97 17.46,62.7 18.73,63.97 16.2,63.97 18.73,61.43 20,62.7 27.62,60.16 28.89,61.43 30.16,60.16 31.44,61.43 73.34,58.89 70.81,58.89 75.88,63.97 73.34,63.97 69.53,70.32 70.81,69.05 68.27,69.05 67,70.32 68.27,61.43 69.53,62.7 67,60.16 62.55,59.52 15.56,15.08 16.83,16.34 15.56,17.62 14.29,16.34 10.48,15.08 9.21,16.34 7.94,15.08 9.21,13.8 7.94,12.53 6.67,13.8 6.67,16.34 5.4,17.62 6.67,18.89 5.4,20.16 4.13,18.89 4.13,21.43 6.67,21.43 5.4,22.7 4.13,23.96 6.67,23.96 6.67,11.27 10.48,9.99 11.75,8.73 13.02,7.45 11.75,6.19 10.48,7.45 9.21,6.19 10.48,4.91 11.75,3.65 10.48,2.38 9.21,3.65 25.09,90.64 28.26,90 29.53,91.28 32.07,91.28 34.61,91.28 46.04,79.84 40.96,79.84 39.69,81.11 49.85,81.11
  pour Top: 1.34,25.11 -0.19,21.04 7.43,2.25 9.97,-0.29 77.03,-0.29 79.82,2.5 87.19,21.04 85.66,25.11 73.73,25.11 73.73,49.75 83.38,49.75 86.68,54.83 86.68,73.62 62.04,98.26 24.96,98.26 0.32,73.62 0.32,55.08 3.37,49.75 13.27,49.75 13.27,25.11
  pour Bottom: 1.46,25.11 -0.06,21.04 7.43,2.38 9.97,-0.16 77.03,-0.16 79.57,2.38 87.19,20.92 85.54,25.11 73.6,25.11 73.6,49.87 83.5,49.87 86.68,54.95 86.68,73.62 62.17,98.13 24.96,98.13 0.45,73.62 0.32,54.95 3.49,49.75 13.15,49.75 13.15,25.23
MOTOR1:M+
  Top 0.813: MOTOR1:SV1.2 28.26,6.65 28.26,8.09 23.69,12.66 23.69,37.05 MOTOR1:U$1.4
  Bottom 0.813: MOTOR1:U$1.4 21.66,42.13 21.66,44.16 MOTOR1:U$1.2
MOTOR1:M-
  Top 0.813: MOTOR1:SV1.1 21.91,11.98 21.91,36.54 20.39,38.06 MOTOR1:U$1.5
  Bottom 0.813: MOTOR1:U$1.5 18.86,39.33 18.86,41.87 MOTOR1:U$1.3
MOTOR2:M+
  Top 0.813: MOTOR2:SV1.2 67.12,6.39 67.12,8.09 62.55,12.66 62.55,37.3 MOTOR2:U$1.4
  Bottom 0.813: MOTOR2:U$1.2 57.98,44.41 57.98,41.87 MOTOR2:U$1.4
MOTOR2:M-
  Top 0.813: MOTOR2:SV1.1 61.03,11.98 61.03,36.28 MOTOR2:U$1.5
  Bottom 0.813: MOTOR2:U$1.5 60.52,39.33 60.52,41.87 MOTOR2:U$1.3
N$1  (via drill 0.35)
  Top 0.254: v54.11,42.28 54.11,49.96 v53.24,50.83 | CPU1:U1.38 47.68,56.37 v47.46,56.15
  Bottom 0.254: MOTOR2:SV1.5 60.52,10.5 55.69,15.33 55.69,40.7 v54.11,42.28 | 53.24,50.72 v53.24,50.83 52.55,51.52 | 52.55,51.52 52.52,51.52 | v47.46,56.15 49.07,56.15 50.87,54.36 50.87,53.2 | 50.87,53.2 50.87,53.17 | 52.55,51.52 50.87,53.2
N$2  (via drill 0.35)
  Top 0.254: v47.86,55.19 48.06,55.39 48.06,55.65 48.28,55.87 CPU1:U1.37 | v53.15,42.38 53.15,49.78 v52.28,50.65
  Bottom 0.254: MOTOR2:SV1.6 59.38,6.01 59.38,11.07 55.29,15.16 55.29,40.25 v53.15,42.38 | v47.86,55.19 49.46,55.19 50.46,54.19 50.46,52.47 v52.28,50.65
N$3
  Top 0.254: MOTOR2:U$1.9 65.85,41.62 65.85,43.14 62.3,46.7 62.04,46.7 58.99,49.75 58.99,50 57.98,51.02 53.91,51.02 52.14,52.79 52.14,56.35 51.62,56.87 CPU1:U1.39
  Bottom 0.508: MOTOR2:U$1.9 67.88,39.59 67.88,36.54 MOTOR2:U$1.7
N$4  (via drill 0.35)
  Top 0.254: v25.59,31.33 25.59,48.86 26.84,50.1 31.86,50.1 33.11,51.36 33.11,51.65 35.83,54.37 CPU1:U1.15
  Bottom 0.406: MOTOR1:SV1.5 21.4,10.63 23.82,13.04 26.61,13.04 27.5,13.93 27.5,29.43 v25.59,31.33
N$5
  Top 0.254: MOTOR2:U$1.10 62.8,47.21 62.3,47.21 59.76,49.75 59.76,50 58.23,51.52 54.17,51.52 52.54,53.15 52.54,56.52 51.7,57.37 CPU1:U1.40
  Bottom 0.508: MOTOR2:U$1.8 65.85,39.08 65.85,42.13 MOTOR2:U$1.10
N$6  (via drill 0.35)
  Top 0.254: v26.1,29.43 24.96,30.57 24.96,48.86 26.61,50.51 31.69,50.51 32.7,51.52 32.7,51.82 35.75,54.87 | 35.75,54.87 CPU1:U1.14 | 34.96,54.08 35.75,54.87
  Bottom 0.406: MOTOR1:SV1.6 20,6.27 20,11.77 21.91,13.68 25.59,13.68 26.74,14.82 26.74,28.66 26.1,29.3 v26.1,29.43
N$7
  Top 0.254: MOTOR1:U$1.9 34.36,47.21 38.04,47.21 39.75,48.92 CPU1:U1.17
  Bottom 0.508: MOTOR1:U$1.7 28.77,36.54 28.77,39.59 MOTOR1:U$1.9
N$8
  Top 0.254: CPU1:U1.16 35.91,53.87 33.52,51.48 33.52,51.19 32.03,49.7 27.45,49.7 26.36,48.6 26.36,44.54 MOTOR1:U$1.10
  Bottom 0.508: MOTOR1:U$1.10 26.74,42.13 26.74,39.08 MOTOR1:U$1.8
N$9  (via drill 0.35)
  Top 0.254: CPU1:U1.36 51.31,55.37 v51.53,55.59 | v54.68,56.35 UI1:R1.1
  Bottom 0.254: 51.37,55.59 v51.53,55.59 52.29,56.35 v54.68,56.35
N$10  (via drill 0.35)
  Top 0.254: CPU1:U1.35 51.29,54.87 v51.53,54.63 | UI1:R2.1 v54.68,54.83
  Bottom 0.254: v54.68,54.83 51.73,54.83 v51.53,54.63
N$11  (via drill 0.35)
  Top 0.254: CPU1:U1.34 50.56,54.37 51.26,53.67 v51.53,53.67 | UI1:R3.1 v54.68,53.3
  Bottom 0.254: v54.68,53.3 54.31,53.67 v51.53,53.67
N$12
  Top 0.254: UI1:R4.1 40.79,33.74 39.56,33.74 38.42,34.89 38.42,43.9 44.25,49.73 CPU1:U1.26
N$13  (via drill 0.35)
  Top 0.254: UI1:R5.2 76.71,7.86 UI1:U$2.2 75.84,9.28 74.23,10.88 74.23,11.9 70.42,15.71 70.42,16.6 64.84,22.19 64.84,33.11 v64.88,33.15 | CPU1:U1.33 48.18,53.87 v47.86,54.19 | v55.82,47.08 v55.82,48.98
  Bottom 0.254: v47.86,54.19 48.24,53.81 49.85,53.81 50.05,53.61 50.05,52.02 52.07,50 54.8,50 v55.82,48.98 | v64.88,33.15 58.89,33.15 57.25,34.79 57.25,45.65 v55.82,47.08
N$14  (via drill 0.35)
  Top 0.254: UI1:R6.2 74.67,2.78 UI1:U$3.2 73.47,5.4 73.47,11.65 69.79,15.33 69.79,16.6 64.2,22.19 v64.2,32.47 | CPU1:U1.44 49.1,59.34 48.25,59.34 48.06,59.15 48.06,59 v47.44,58.38 | v54.72,47.08 v54.72,48.98
  Bottom 0.254: v47.44,58.38 47.44,57.72 46.85,57.13 46.85,54.34 47.79,53.4 49.24,53.4 49.65,53 49.65,51.85 51.9,49.59 54.11,49.59 v54.72,48.98 | v64.2,32.47 58.99,32.47 56.84,34.63 56.84,45.3 55.82,46.32 54.93,46.32 54.72,46.53 v54.72,47.08
N$15
  Top 0.254: CPU1:U1.30 46.22,51.96 46.22,50.37 42.23,46.38 GYRO1:U$1.SDA
N$16
  Top 0.254: CPU1:U1.29 45.75,50.47 39.69,44.41 GYRO1:U$1.SCL
N$17  (via drill 0.35)
  Top 0.254: SENSOR1:R1.1 32.84,64.99 33.89,64.99 v34.59,65.86 | CPU1:U1.62 40.72,63.28 40.72,64.12 40.64,64.2 v40.64,65.17
  Bottom 0.254: v40.64,65.17 36.2,65.17 35.51,65.86 v34.59,65.86
N$18
  Top 0.254: CPU1:U1.61 41.25,65.46 40.96,65.75 40.96,66.92 40.1,67.78 35.88,67.78 34.61,69.05 SENSOR2:R1.1
N$19  (via drill 0.35)
  Top 0.254: SENSOR1:R7.1 26.49,62.19 v27.42,62.19 | v35.89,57.12 36.64,56.37 CPU1:U1.11
  Top 0.406: SENSOR1:R7.1 26.4,62.95 25.39,63.97 24.72,63.97 SENSOR1:IC2.4
  Bottom 0.254: v35.89,57.12 35.37,57.64 35.37,60.09 33.27,62.19 v27.42,62.19
N$20  (via drill 0.35)
  Top 0.254: SENSOR2:R7.1 v30.55,75.15 | v36.61,57.76 36.81,57.56 36.81,57.09 37.03,56.87 CPU1:U1.10
  Top 0.406: SENSOR2:R7.1 31.22,76.07 31.56,76.42 31.56,78.8 SENSOR2:IC2.4
  Bottom 0.254: v30.55,75.15 32.58,73.11 32.58,66.64 33.59,65.62 33.59,62.45 36.61,59.43 v36.61,57.76
N$21
  Top 0.254: SENSOR3:R1.1 60.01,63.34 60.01,63.97 58.99,64.99 43.98,64.99 43.62,65.34 43.12,65.34 42.75,64.97 CPU1:U1.58
N$22  (via drill 0.35)
  Top 0.254: SENSOR3:R7.1 v57.8,66.76 | v40.96,57.37 CPU1:U1.9
  Top 0.406: SENSOR3:IC2.4 61.71,65.75 58.82,65.75 58.57,66 58.57,66.6 SENSOR3:R7.1
  Bottom 0.254: v40.96,57.37 44.26,60.67 44.26,60.76 44.77,61.26 44.77,62.1 44.26,62.61 44.26,63.97 46.29,66 55.06,66 55.82,66.76 v57.8,66.76
N$23
  Top 0.254: SENSOR4:R1.1 62.13,74.35 60.9,73.11 58.87,73.11 55.18,69.43 55.18,66 54.68,65.49 44.04,65.49 43.79,65.75 42.95,65.75 42.25,65.04 CPU1:U1.59
N$24  (via drill 0.35)
  Top 0.254: SENSOR4:R7.1 v55.18,74.38 | CPU1:U1.8 40.19,57.87 41.64,59.32 v42.05,59.32
  Top 0.406: SENSOR4:R7.1 55.86,75.31 56.2,75.65 56.2,78.04 SENSOR4:IC2.4
  Bottom 0.254: v55.18,74.38 55.18,67.02 54.68,66.51 46.04,66.51 43.75,64.22 43.75,62.54 44.36,61.94 44.36,61.43 44.01,61.08 43.81,61.08 v42.05,59.32
N$25  (via drill 0.35)
  Top 0.254: CPU1:U1.42 57.61,58.37 58.11,57.87 v58.11,57.83
  Bottom 0.254: v58.11,57.83 58.11,51.65 61.41,48.35 65.79,48.35 66.51,49.08 68.05,49.08 69.41,47.71 UI1:JP1.4
N$26  (via drill 0.35)
  Top 0.254: CPU1:U1.43 57.97,58.87 v58.05,58.79
  Bottom 0.254: v58.05,58.79 58.71,58.12 58.71,57.58 58.51,57.38 58.51,51.82 61.58,48.76 65.62,48.76 66.34,49.48 68.21,49.48 68.98,50.25 UI1:JP1.3
N$27  (via drill 0.35)
  Top 0.254: CPU1:U1.27 44.75,53.41 v44.77,53.43 | UI1:R8.1 v22.55,57.75
  Bottom 0.254: v22.55,57.75 25.47,54.82 34.13,54.82 34.13,54.83 38.42,54.83 40.07,53.17 44.52,53.17 v44.77,53.43
N$28  (via drill 0.35)
  Top 0.254: CPU1:U1.28 45.25,51.08 v44.9,50.73 | v18.73,57.75 UI1:R9.1
  Bottom 0.254: v44.9,50.73 43.63,50.73 43.12,51.24 37.3,51.24 34.13,54.42 22.07,54.42 v18.73,57.75
N$29  (via drill 0.35)
  Top 0.254: v43.37,64.73 43.79,64.31 44.03,64.31 44.25,64.09 CPU1:U1.55 | v35.75,64.1 36.26,63.59 36.26,62.06 34.15,59.96 34.08,59.96 34.03,59.91 32.96,59.91 32.2,59.14 v31.94,59.14 | UI1:R10.1 v20.64,57.75
  Bottom 0.254: v43.37,64.73 41.06,64.73 40.9,64.57 36.23,64.57 v35.75,64.1 | v20.64,57.75 22.04,59.14 v31.94,59.14
N$30  (via drill 0.35)
  Top 0.254: CPU1:U1.56 43.72,63.22 43.72,62.3 43.12,61.7 v43.12,61.56 | UI1:R11.1 24.45,57.24 25.47,58.26 29.32,58.26 v34.38,63.31
  Bottom 0.254: v43.12,61.56 41.36,63.31 v34.38,63.31
N$31  (via drill 0.35)
  Top 0.254: v40.96,61.94 42.64,61.94 42.88,62.18 43.03,62.18 43.25,62.4 CPU1:U1.57 | UI1:R12.1 28.25,56.56 34.26,62.57 v35.12,62.57
  Bottom 0.254: v40.96,61.94 35.75,61.94 v35.12,62.57
POWER1:BAT
  Top 0.508: POWER1:R1.1 43.16,8.52 POWER1:T1.2 40.71,7.51 40.71,6.31 39.94,5.55 36.03,5.55 POWER1:CN1.P$1
POWER1:N$1
  Top 0.508: POWER1:T1.3 43.1,6.59 POWER1:R1.2 43.59,6.73 44.01,6.31 44.01,4.77 POWER1:U$1.B
POWER1:N$2
  Bottom 1.016: POWER1:CN1.P$2 POWER1:CN2.P$1
POWER1:N$3
  Top 0.254: POWER1:LD-3V3.A 3.37,16.85 3.49,16.6 POWER1:R2.2
POWER1:N$4
  Top 0.254: POWER1:R3.2 POWER1:LD-5V.A
POWER1:VCC  (via drill 0.35)
  Top 0.254: POWER1:3V3-2:U1.3 11.97,15.49 12.26,15.79 11.78,16.59 POWER1:3V3-3:C1.1 | POWER1:3V3-1:C1.1 12.08,23.6 POWER1:3V3-1:U1.3
  Top 0.813: v31.82,8.85 36.13,8.85 37.4,7.58 39.66,7.58 POWER1:T1.1 v39.69,9.36 | 15,7.58 POWER1:3V3-3:U1.3 14.99,8.28 15.39,8.69 POWER1:3V3-2:C1.1 v16.83,9.61 | 12,15.46 11.97,15.49 | v13.27,23.33 13.19,23.42 POWER1:3V3-1:C1.1 | v13.02,15.46 13.02,16.22 12.65,16.59 11.78,16.59 11.94,16.43 POWER1:3V3-2:U1.3 | POWER1:5V1:U$1.1 76.69,14.61 POWER1:5V1:C1.1 73.31,14.61 v73.22,14.69
  Bottom 0.813: v31.82,8.85 30.04,7.07 30.04,3.26 29.02,2.25 20.64,2.25 16.83,6.06 v16.83,9.61 16.83,11.9 13.27,15.46 v13.02,15.46 13.02,23.33 v13.27,23.33 | v39.69,9.36 53.91,9.36 53.91,1.49 73.22,1.49 v73.22,14.69
SENSOR1:N$1
  Top 0.152: 31.48,63.37 SENSOR1:R2.1
  Top 0.406: SENSOR1:R2.1 30.05,63.37 29.73,63.69 SENSOR1:IC1.1 | SENSOR1:R1.2 31.48,63.37
SENSOR1:N$2
  Top 0.406: SENSOR1:Q1.2 26.72,70 27.67,69.05 27.67,68.29 28.69,67.27 SENSOR1:R3.1 29.62,66.05 SENSOR1:IC1.3
SENSOR1:N$3
  Top 0.152: 27.13,66 SENSOR1:IC1.4
  Top 0.406: SENSOR1:Q1.1 26.84,68.1 27.16,67.78 27.16,66.03 27.13,66
SENSOR1:N$4
  Top 0.152: SENSOR1:R4.2 20.81,66 | SENSOR1:C1.2 20.9,66.09 20.81,66 | SENSOR1:R6.1 21.32,62.45 21.32,62.7 | 20.56,65.75 20.81,66
  Top 0.406: SENSOR1:IC2.1 21.99,66 20.81,66 | SENSOR1:R4.2 20.65,63.99 21.25,63.39 21.25,62.52 21.32,62.45
SENSOR1:N$5
  Top 0.406: SENSOR1:U$1.P$2 17.99,70.07 21.58,70.07 22.59,69.05 SENSOR1:Q1.3
SENSOR1:N$7
  Top 0.152: 24.88,60.58 25.39,60.58 | 25.39,60.58 25.64,60.58 | 25.39,60.58 25.39,62.7
  Top 0.406: 25.13,60.58 25.64,60.58 | 25.64,60.58 SENSOR1:R7.2 | 25.64,60.58 25.39,60.83 | 25.39,60.83 25.39,62.7 25.39,62.95 25.13,63.21 23.86,63.21 23.03,64.04 SENSOR1:IC2.3 | SENSOR1:R8.1 24.88,60.58 25.13,60.58 | 25.39,60.83 25.13,60.58
SENSOR1:N$8
  Top 0.152: SENSOR1:R8.2 SENSOR1:C2.1
SENSOR1:N$9
  Top 0.406: SENSOR1:R5.1 SENSOR1:C1.1 17.51,67.53 SENSOR1:U$1.P$4
SENSOR2:N$1
  Top 0.406: SENSOR2:IC1.1 36.42,78.31 SENSOR2:R2.1
  Top 0.61: SENSOR2:R1.2 36.21,78.28 SENSOR2:R2.1
SENSOR2:N$2
  Top 0.406: SENSOR2:Q1.2 35.81,81.56 35.88,81.5 36.35,81.5 SENSOR2:IC1.3 37.25,81.43 SENSOR2:R3.1
SENSOR2:N$3
  Top 0.406: SENSOR2:IC1.4 33.82,83.35 SENSOR2:Q1.1
SENSOR2:N$4
  Top 0.406: SENSOR2:IC2.1 28.67,80.99 27.33,80.99 27.16,81.16 | 27.16,81.16 SENSOR2:R6.1 | 27.16,81.16 27.16,82.17 27.75,82.77 28.6,82.77 SENSOR2:R4.2 SENSOR2:C1.2
SENSOR2:N$5
  Top 0.406: SENSOR2:Q1.3 34.86,86.58 33.22,88.22 SENSOR2:U$1.P$2
SENSOR2:N$7
  Top 0.406: SENSOR2:IC2.3 29.97,79.02 30.33,78.66 30.33,77.99 SENSOR2:R7.2 SENSOR2:R8.1
SENSOR2:N$8
  Top 0.406: SENSOR2:C2.1 SENSOR2:R8.2
SENSOR2:N$9
  Top 0.254: SENSOR2:R5.1 31.82,85.79 SENSOR2:U$1.P$4
  Top 0.406: SENSOR2:C1.1 SENSOR2:R5.1
SENSOR3:N$1
  Top 0.254: SENSOR3:IC1.1 61.93,60.31 61.53,59.91 59.5,59.91 58.41,61 SENSOR3:R2.1 SENSOR3:R1.2
SENSOR3:N$2
  Top 0.254: SENSOR3:R3.1 65.34,60.45 65.34,61.68
  Top 0.406: SENSOR3:Q1.2 65.78,61.68 65.34,61.68 64.37,61.68 SENSOR3:IC1.3
SENSOR3:N$3
  Top 0.254: SENSOR3:Q1.1 63.93,63.65 SENSOR3:IC1.4
SENSOR3:N$4
  Top 0.406: SENSOR3:R6.1 63.83,69.4 SENSOR3:IC2.1 64.12,68.29 SENSOR3:R4.2 SENSOR3:C1.2
SENSOR3:N$5
  Top 0.406: SENSOR3:Q1.3 68.05,63.29 68.73,63.97 71.01,63.97 71.64,64.59 SENSOR3:U$1.P$2
SENSOR3:N$7
  Top 0.406: SENSOR3:IC2.3 61.9,68.54 SENSOR3:R8.1 SENSOR3:R7.2
SENSOR3:N$8
  Top 0.406: SENSOR3:R8.2 SENSOR3:C2.1
SENSOR3:N$9
  Top 0.406: SENSOR3:C1.1 SENSOR3:R5.1 67.56,64.97 SENSOR3:U$1.P$4
SENSOR4:N$1
  Top 0.406: SENSOR4:IC1.1 60.43,78.4 SENSOR4:R2.1 SENSOR4:R1.2
SENSOR4:N$2
  Top 0.406: SENSOR4:Q1.2 60.45,80.76 SENSOR4:IC1.3 60.87,80.48 61.7,80.48 SENSOR4:R3.1
SENSOR4:N$3
  Top 0.406: SENSOR4:IC1.4 58.55,80.76 SENSOR4:Q1.1
SENSOR4:N$4
  Top 0.406: SENSOR4:C1.2 SENSOR4:R4.2 52.56,82.68 51.63,81.75 SENSOR4:R6.1 52.29,80.41 SENSOR4:IC2.1
SENSOR4:N$5
  Top 0.406: SENSOR4:U$1.P$2 59.5,85.85 SENSOR4:Q1.3
SENSOR4:N$7
  Top 0.406: SENSOR4:IC2.3 53.12,77.3 SENSOR4:R8.1 SENSOR4:R7.2
SENSOR4:N$8
  Top 0.406: SENSOR4:R8.2 SENSOR4:C2.1
SENSOR4:N$9
  Top 0.406: SENSOR4:C1.1 SENSOR4:R5.1 56.96,85.87 SENSOR4:U$1.P$4
UI1:N$1
  Top 0.254: UI1:LED1.A 57.56,56.1 UI1:R1.2
UI1:N$2
  Top 0.254: UI1:R2.2 UI1:LED2.A
UI1:N$3
  Top 0.254: UI1:R3.2 57.56,53.56 UI1:LED3.A
UI1:N$4
  Top 0.508: UI1:U$1.- 39.6,28.24 UI1:T1.3 39.77,28.41 UI1:D1.A
UI1:N$5
  Top 0.508: UI1:T1.1 40.72,30.61 UI1:R4.2
UI1:N$6
  Top 0.254: UI1:R7.1 68.13,55.11 68.52,55.11 68.74,55.33 UI1:JP1.1
UI1:N$7
  Top 0.254: UI1:R7.2 69.19,57.87 UI1:LED4.A
UI1:N$8
  Top 0.254: UI1:R8.2 UI1:LED5.A
UI1:N$9
  Top 0.254: UI1:LED6.A UI1:R9.2
UI1:N$10
  Top 0.254: UI1:R10.2 UI1:LED7.A
UI1:N$11
  Top 0.254: UI1:R11.2 UI1:LED8.A
UI1:N$12
  Top 0.254: UI1:R12.2 UI1:LED9.A
VCCM1
  Top 1.016: MOTOR1:U$1.1 18.61,46.7 18.61,15.71 16.07,13.17 13.57,13.17 POWER1:3V3-2:C2.1 13.23,13.17 POWER1:3V3-2:U1.2
VCCM2
  Top 1.016: MOTOR2:U$1.1 57.22,46.19 57.22,34.25 58.99,32.47 58.99,14.44 57.22,12.66 33.34,12.66 30.04,9.36 30.04,3.52 28.77,2.25 19.62,2.25 18.48,1.1 POWER1:3V3-3:C2.1 13.23,4.75 13.78,5.3 POWER1:3V3-3:U1.2

## Text on the board
tPlace: μ(ru)^2 v1.1